# EAGLE board Controller (EAGLE 7.2.0)
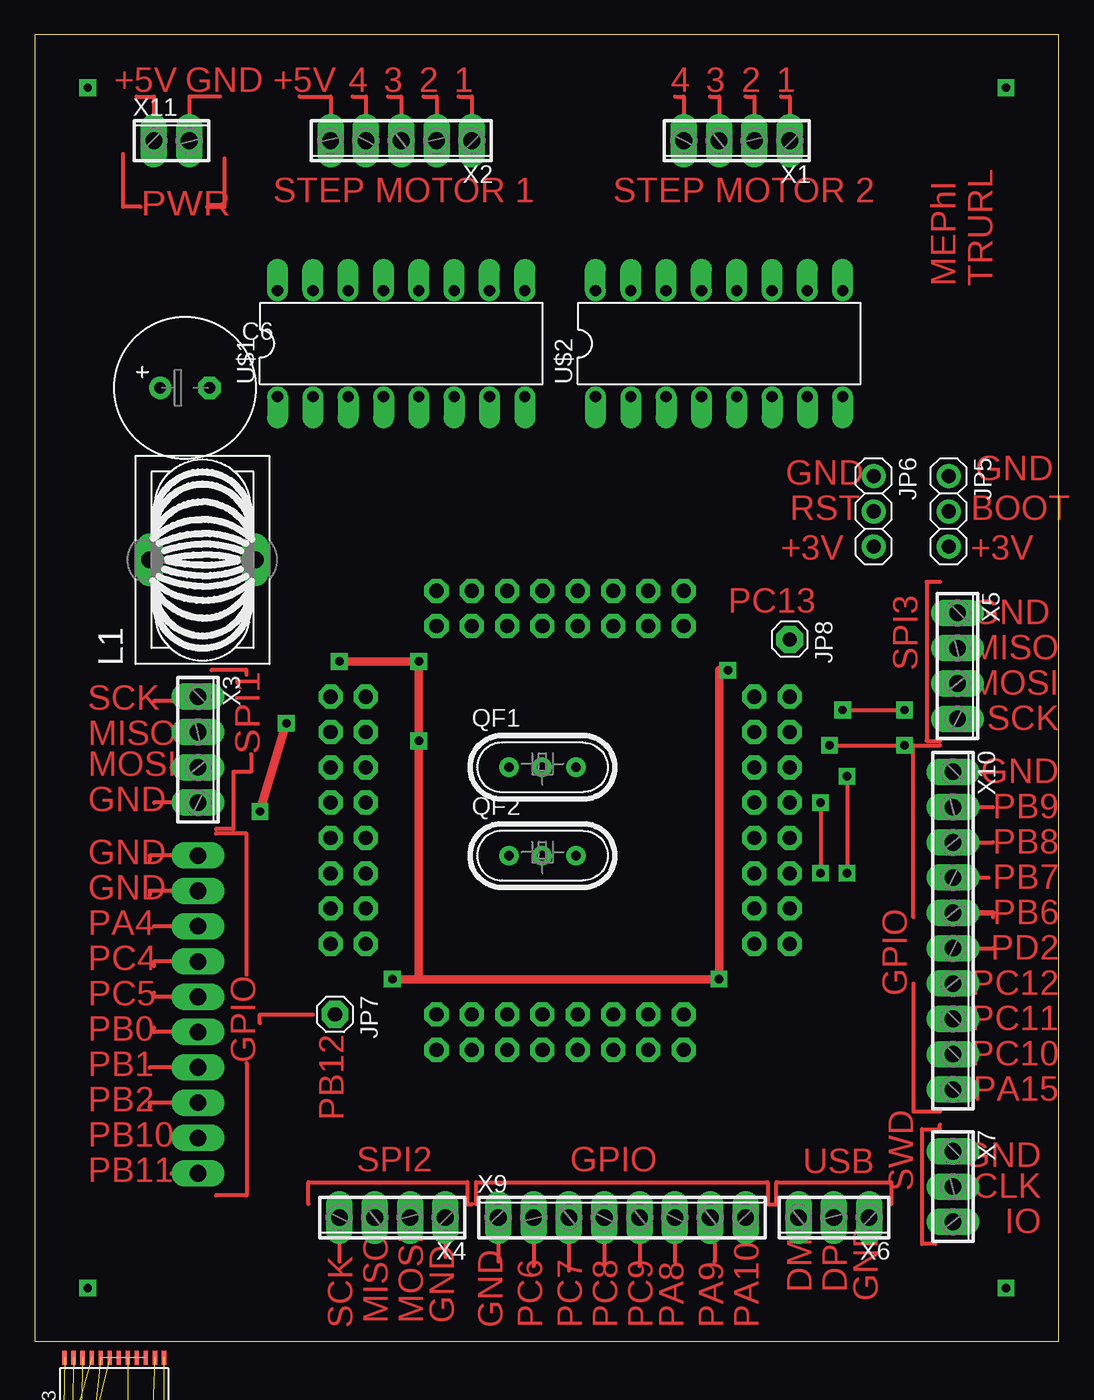
[diagram p0: board, top side]
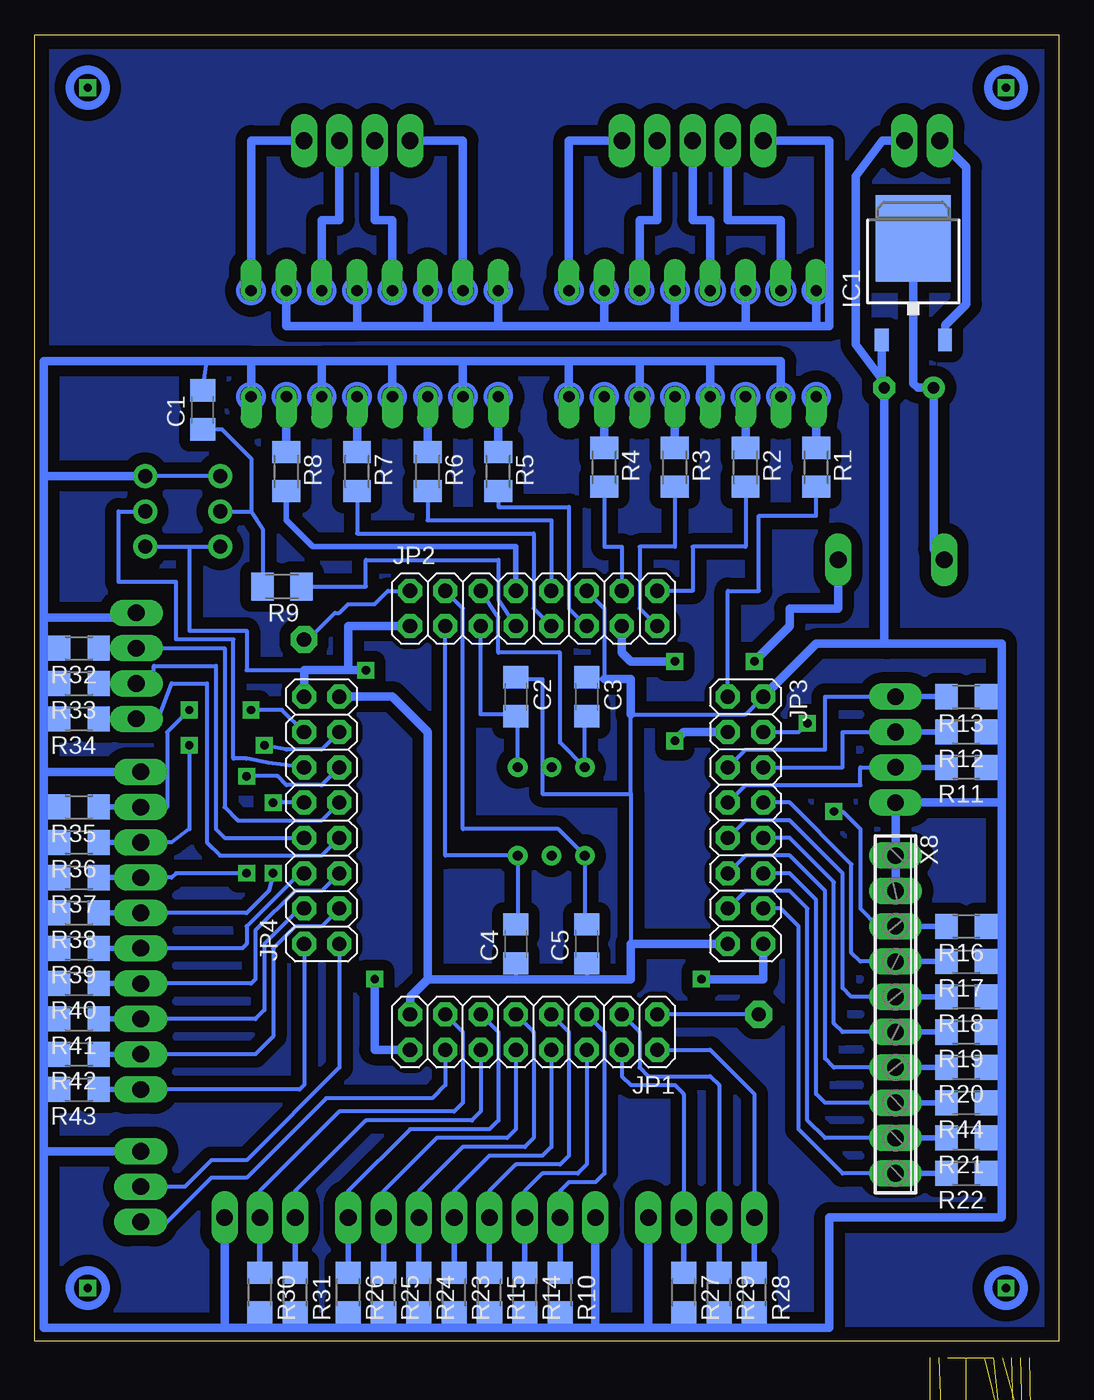
[diagram p1: board, bottom side, seen from below]

Size 73.66 x 93.98 mm. Coordinates in mm from the lower left corner, seen from the top.
Outline: 0,0 73.66,0 73.66,93.98 0,93.98 0,0
Copper layers (1*16): Top 0.035mm / dielectric 1.5mm / Bottom 0.035mm
Design rules "default *": minimum track width 10mil, minimum drill 24mil, track to track 8mil, track to pad 8mil, pad to pad 8mil, via to via 8mil, smd to smd 8mil, copper to edge 40mil, drill to drill 8mil, minimum pad ring 14mil, minimum via ring 12mil, stop-mask expansion 4mil, vias tented up to drill 0mil, thermal gap 10mil

## Footprints (pad centres in the part's own frame; a part is rotated, then mirrored left to right if it is on the bottom)
C1206 = smd 1.6 x 1.8: 1 -1.4,0; 2 1.4,0
E3,5-10 = drill 0.813 pad 1.6: + -1.778,0 | drill 0.813 pad 1.6 octagon: - 1.778,0
E1,8-4 = drill 0.711 pad 1.168: + -0.889,0 | drill 0.711 pad 1.168 octagon: - 0.889,0
TO252 = smd 1 x 1.6: 1 -2.28,-4.8; 2 2.28,-4.8 | smd 5.4 x 6.2: TAB 0,2.5
2X08 = drill 1.016 octagon: 1 -8.89,-1.27; 2 -8.89,1.27; 3 -6.35,-1.27; 4 -6.35,1.27; 5 -3.81,-1.27; 6 -3.81,1.27; 7 -1.27,-1.27; 8 -1.27,1.27; 9 1.27,-1.27; 10 1.27,1.27; 11 3.81,-1.27; 12 3.81,1.27; 13 6.35,-1.27; 14 6.35,1.27; 15 8.89,-1.27; 16 8.89,1.27
1X03 = drill 1.016: 1 -2.54,0; 2 0,0; 3 2.54,0
1X01 = drill 1.016 pad 1.93 octagon: 1 0,0
1X02 = drill 1.016 long: 1 -1.27,0; 2 1.27,0
1X08 = drill 1.016 long: 1 -8.89,0; 2 -6.35,0; 3 -3.81,0; 4 -1.27,0; 5 1.27,0; 6 3.81,0; 7 6.35,0; 8 8.89,0
1X06 = drill 1.016 long: 1 -6.35,0; 2 -3.81,0; 3 -1.27,0; 4 1.27,0; 5 3.81,0; 6 6.35,0
A26GFC = drill 1.194 long: 1 0,3.81; 2 0,-3.81
HC49U = drill 0.7 pad 1.2: 1 -2.413,0; 2 -0.027,0; 3 2.413,0
M1206 = smd 1.6 x 2: 1 -1.4,0; 2 1.4,0
R1206 = smd 1.6 x 1.803: 1 -1.422,0; 2 1.422,0
DIL16 = drill 0.813 offset: 1 -8.89,-3.81; 2 -6.35,-3.81; 3 -3.81,-3.81; 4 -1.27,-3.81; 5 1.27,-3.81; 6 3.81,-3.81; 7 6.35,-3.81; 8 8.89,-3.81; 9 8.89,3.81; 10 6.35,3.81; 11 3.81,3.81; 12 1.27,3.81; 13 -1.27,3.81; 14 -3.81,3.81; 15 -6.35,3.81; 16 -8.89,3.81
TSSOP24 = smd 0.305 x 0.991: 1 -3.575,-2.918; 2 -2.925,-2.918; 3 -2.275,-2.918; 4 -1.625,-2.918; 5 -0.975,-2.918; 6 -0.325,-2.918; 7 0.325,-2.918; 8 0.975,-2.918; 9 1.625,-2.918; 10 2.275,-2.918; 11 2.925,-2.918; 12 3.575,-2.918; 13 3.575,2.918; 14 2.925,2.918; 15 2.275,2.918; 16 1.625,2.918; 17 0.975,2.918; 18 0.325,2.918; 19 -0.325,2.918; 20 -0.975,2.918; 21 -1.625,2.918; 22 -2.275,2.918; 23 -2.925,2.918; 24 -3.575,2.918
SOT25 = smd 0.55 x 1.2: 1 -0.95,-1.3; 2 0,-1.3; 3 0.95,-1.3; 4 0.95,1.3; 5 -0.95,1.3
4POL254 = drill 1.2 long: 1 -3.81,0; 2 -1.27,0; 3 1.27,0; 4 3.81,0
5POL254 = drill 1.2 long: 1 -5.08,0; 2 -2.54,0; 3 0,0; 4 2.54,0; 5 5.08,0
3POL254 = drill 1.2 long: 1 -2.54,0; 2 0,0; 3 2.54,0
10POL254 = drill 1.2 long: 1 -11.43,0; 2 -8.89,0; 3 -6.35,0; 4 -3.81,0; 5 -1.27,0; 6 1.27,0; 7 3.81,0; 8 6.35,0; 9 8.89,0; 10 11.43,0
8POL254 = drill 1.2 long: 1 -8.89,0; 2 -6.35,0; 3 -3.81,0; 4 -1.27,0; 5 1.27,0; 6 3.81,0; 7 6.35,0; 8 8.89,0
2POL254 = drill 1.2 long: 1 -1.27,0; 2 1.27,0

## Placement (x,y rotation side)
C1  [C1206]  61.59,66.99 90 bottom
C2  [C1206]  39.05,46.35 270 bottom
C3  [C1206]  33.97,46.35 270 bottom
C4  [C1206]  39.05,28.57 90 bottom
C5  [C1206]  33.97,28.57 90 bottom
C6  [E3,5-10]  10.79,68.58 0 top
C7  1uF  [C1206]  2.54,-18.41 0 top  (outside the outline)
C8  2.2uF  [C1206]  2.54,-22.54 0 top  (outside the outline)
C9  0.01uF  [C1206]  2.54,-26.67 0 top  (outside the outline)
C10  22uF  [E1,8-4]  2.22,-82.87 0 top  (outside the outline)
C11  22uF  [E1,8-4]  2.22,-87.63 0 top  (outside the outline)
C12  0.1uF  [C1206]  2.54,-93.03 0 top  (outside the outline)
C13  0.1uF  [C1206]  2.54,-99.06 0 top  (outside the outline)
IC1  LM1117IDTX-5.0  [TO252]  10.48,76.83 0 bottom
JP1  [2X08]  37.78,22.23 180 bottom
JP2  [2X08]  37.78,52.7 0 bottom
JP3  [2X08]  22.54,37.47 270 bottom
JP4  [2X08]  53.02,37.47 90 bottom
JP5  [1X03]  65.72,59.69 270 top
JP6  [1X03]  60.33,59.69 270 top
JP7  [1X01]  21.59,23.5 270 top
JP8  [1X01]  54.29,50.48 270 top
JP9  [1X02]  3.17,-33.34 0 top  (outside the outline)
JP10  [1X08]  10.79,-105.73 0 top  (outside the outline)
JP11  [1X06]  8.26,-43.5 0 top  (outside the outline)
JP12  [1X02]  3.17,-110.81 0 top  (outside the outline)
JP13  [1X06]  8.26,-115.89 0 top  (outside the outline)
L1  A26GFC  [A26GFC]  12.06,56.2 90 top
QF1  8M10AHC49T  [HC49U]  36.51,41.27 0 top
QF2  8M10AHC49T  [HC49U]  36.51,34.92 0 top
R1  100  [M1206]  17.46,62.87 270 bottom
R2  100  [M1206]  22.54,62.87 270 bottom
R3  100  [M1206]  27.62,62.87 270 bottom
R4  100  [M1206]  32.7,62.87 270 bottom
R5  100  [M1206]  40.32,62.55 270 bottom
R6  100  [M1206]  45.4,62.55 270 bottom
R7  100  [M1206]  50.48,62.55 270 bottom
R8  100  [M1206]  55.56,62.55 270 bottom
R9  [M1206]  55.88,54.29 180 bottom
R10  100  [R1206]  35.88,3.49 270 bottom
R11  100  [R1206]  6.67,41.27 180 bottom
R12  100  [R1206]  6.67,43.81 180 bottom
R13  100  [R1206]  6.67,46.35 180 bottom
R14  100  [R1206]  38.42,3.49 270 bottom
R15  100  [R1206]  40.96,3.49 270 bottom
R16  100  [R1206]  6.67,29.84 180 bottom
R17  100  [R1206]  6.67,27.3 180 bottom
R18  100  [R1206]  6.67,24.77 180 bottom
R19  100  [R1206]  6.67,22.23 180 bottom
R20  100  [R1206]  6.67,19.68 180 bottom
R21  100  [R1206]  6.67,14.61 180 bottom
R22  100  [R1206]  6.67,12.06 180 bottom
R23  100  [R1206]  43.5,3.49 270 bottom
R24  100  [R1206]  46.04,3.49 270 bottom
R25  100  [R1206]  48.58,3.49 270 bottom
R26  100  [R1206]  51.12,3.49 270 bottom
R27  100  [R1206]  26.99,3.49 270 bottom
R28  100  [R1206]  21.91,3.49 270 bottom
R29  100  [R1206]  24.45,3.49 270 bottom
R30  100  [R1206]  57.47,3.49 270 bottom
R31  100  [R1206]  54.93,3.49 270 bottom
R32  100  [R1206]  70.48,49.85 180 bottom
R33  100  [R1206]  70.48,47.31 180 bottom
R34  100  [R1206]  70.48,44.77 180 bottom
R35  100  [R1206]  70.48,38.42 180 bottom
R36  100  [R1206]  70.48,35.88 180 bottom
R37  100  [R1206]  70.48,33.34 180 bottom
R38  100  [R1206]  70.48,30.8 180 bottom
R39  100  [R1206]  70.48,28.26 180 bottom
R40  100  [R1206]  70.48,25.72 180 bottom
R41  100  [R1206]  70.48,23.18 180 bottom
R42  100  [R1206]  70.48,20.64 180 bottom
R43  100  [R1206]  70.48,18.1 180 bottom
R44  100  [R1206]  6.67,17.14 180 bottom
R45  100  [R1206]  2.54,-53.02 0 top  (outside the outline)
R46  100  [R1206]  2.54,-59.05 0 top  (outside the outline)
R47  100  [R1206]  2.54,-65.09 0 top  (outside the outline)
R48  100  [R1206]  2.54,-71.12 0 top  (outside the outline)
R49  100  [R1206]  2.54,-77.15 0 top  (outside the outline)
U$1  LTV847  [DIL16]  26.35,71.75 0 top
U$2  LTV847  [DIL16]  49.21,71.75 0 top
U$3  AD7190  [TSSOP24]  5.71,-4.13 0 top
U$4  LP2985AIM5-3.3  [SOT25]  2.54,-11.43 0 top  (outside the outline)
X1  [4POL254]  50.48,86.36 180 top
X2  [5POL254]  26.35,86.36 180 top
X3  [4POL254]  11.75,42.55 270 top
X4  [4POL254]  25.72,8.89 180 top
X5  [4POL254]  66.36,48.58 270 top
X6  [3POL254]  57.47,8.89 180 top
X7  [3POL254]  66.04,11.11 270 top
X8  [10POL254]  11.75,23.5 270 bottom
X9  [8POL254]  42.23,8.89 0 top
X10  [10POL254]  66.04,29.53 270 top
X11  [2POL254]  9.84,86.36 0 top

## Library data of the parts
C1-C5 C10 C11 = rcl
C6 JP5-JP8 = adafruit
C7-C9 C12 C13 R1-R49 = resistor
IC1 = lm1117
JP1-JP4 JP9-JP13 = pinhead
L1 = inductors
QF1 QF2 = crystal; OC_FARNELL: unknown; OC_NEWARK: unknown
U$1 U$2 = optocoupler
U$3 = analog-devices
U$4 = LP2985
X1-X11 = con-phoenix-254; OC_FARNELL: unknown; OC_NEWARK: unknown

## Nets
BYPASS: C9.1 U$4.4
N$1: R1.1 U$1.1
N$2: R2.1 U$1.3
N$3: C1.1 JP6.2 R9.2
N$4: R3.1 U$1.5
N$5: R5.1 U$2.1
N$6: R6.1 U$2.3
N$7: R7.1 U$2.5
N$8: R8.1 U$2.7
N$9: R4.1 U$1.7
N$10: C7.1 C11.+ C12.1 JP9.2 U$3.15 U$3.20 U$4.1 U$4.3
N$11: JP2.9 R7.2
N$12: JP2.10 R6.2
N$13: JP2.11 R5.2
N$14: JP2.14 R4.2
N$15: JP2.15 R3.2
N$16: JP1.16 JP2.1 JP2.13 JP3.3 JP3.16 JP4.16 JP5.3 JP6.3 L1.2
N$17: JP3.1 R1.2
N$18: C3.2 JP2.6 QF1.1
N$19: U$1.10 U$1.12 U$1.14 U$1.16 U$2.10 U$2.12 U$2.14 U$2.16 X2.5
N$20: U$1.15 X2.4
N$21: U$1.13 X2.3
N$22: U$1.11 X2.2
N$23: U$1.9 X2.1
N$24: U$2.15 X1.4
N$25: U$2.13 X1.3
N$26: U$2.11 X1.2
N$27: U$2.9 X1.1
N$28: JP4.9 R32.1 X5.2
N$29: JP4.8 R33.1 X5.3
N$30: JP4.7 R34.1 X5.4
N$31: JP1.4 R27.1 X4.2
N$32: JP1.3 R29.1 X4.3
N$33: JP1.2 R28.1 X4.4
N$34: JP3.7 R11.2 X3.3
N$35: JP3.6 R12.2 X3.2
N$36: JP3.5 R13.2 X3.1
N$37: JP4.1 X7.2
N$38: JP1.14 X7.3
N$39: JP1.13 R30.1 X6.2
N$40: JP1.12 R31.1 X6.3
N$41: JP3.4 R16.2 X8.3
N$42: JP3.8 R17.2 X8.4
N$43: JP3.9 R18.2 X8.5
N$44: JP3.10 R19.2 X8.6
N$45: JP3.11 R20.2 X8.7
N$46: JP3.12 R44.2 X8.8
N$47: JP3.13 R21.2 X8.9
N$48: JP3.14 R22.2 X8.10
N$49: JP1.5 R10.1 X9.2
N$50: JP1.6 R14.1 X9.3
N$51: JP1.7 R15.1 X9.4
N$52: JP1.8 R23.1 X9.5
N$53: JP1.9 R24.1 X9.6
N$54: JP1.10 R25.1 X9.7
N$55: JP1.11 R26.1 X9.8
N$56: JP4.14 R35.1 X10.2
N$57: JP4.13 R36.1 X10.3
N$58: JP4.11 R37.1 X10.4
N$59: JP4.10 R38.1 X10.5
N$60: JP4.6 R39.1 X10.6
N$61: JP4.5 R40.1 X10.7
N$62: JP4.4 R41.1 X10.8
N$63: JP4.3 R42.1 X10.9
N$64: JP4.2 R43.1 X10.10
N$65: JP1.1 JP7.1
N$66: C1.2 C2.1 C3.1 C4.1 C5.1 C6.- IC1.1 JP1.15 JP2.12 JP3.2 JP3.15 JP4.15 JP5.1 JP6.1 R10.2 R11.1 R12.1 R13.1 R14.2 R15.2 R16.1 R17.1 R18.1 R19.1 R20.1 R21.1 R22.1 R23.2 R24.2 R25.2 R26.2 R27.2 R28.2 R29.2 R30.2 R31.2 R32.2 R33.2 R34.2 R35.2 R36.2 R37.2 R38.2 R39.2 R40.2 R41.2 R42.2 R43.2 R44.1 U$1.2 U$1.4 U$1.6 U$1.8 U$2.2 U$2.4 U$2.6 U$2.8 X3.4 X4.1 X5.1 X6.1 X7.1 X8.1 X8.2 X9.1 X10.1 X11.2
N$67: IC1.2 X11.1
N$68: JP2.7 R9.1
N$69: JP4.12 JP5.2
N$70: C2.2 JP2.5 QF1.3
N$71: C4.2 JP2.3 QF2.3
N$72: C5.2 JP2.4 QF2.1
N$73: JP2.2 JP8.1
N$74: C6.+ IC1.TAB L1.1
N$77: JP2.16 R2.2
N$97: JP10.1 JP10.3 JP10.5 JP10.7 U$3.17
N$100: JP2.8 R8.2
N$101: C8.1 C10.+ C13.1 U$3.21 U$4.5
N$102: JP11.2 R45.2
N$103: JP11.3 R46.2
N$104: JP11.4 R47.2
N$105: JP11.5 R48.2
N$106: JP11.6 R49.2
N$107: R45.1 U$3.24
N$108: R46.1 U$3.23
N$109: R47.1 U$3.3
N$110: R48.1 U$3.4
N$111: R49.1 U$3.22
N$112: JP10.8 U$3.11
N$113: JP10.6 U$3.12
N$114: JP10.4 U$3.13
N$115: JP10.2 U$3.14
N$116: C7.2 C8.2 C9.2 C10.- C11.- C12.2 C13.2 JP9.1 JP11.1 JP13.1 U$3.16 U$3.18 U$3.19 U$4.2
N$117: JP12.2 U$3.1
N$118: JP12.1 U$3.2
N$119: JP13.6 U$3.5
N$120: JP13.5 U$3.6
N$121: JP13.4 U$3.7
N$122: JP13.3 U$3.8
N$123: JP13.2 U$3.10

## Tracks (layer width: path | path; a pad name or v marks a point on that pad's centre or on a via)
BYPASS  (1 unrouted)
N$1
  Bottom 0.61: R1.1 U$1.1
N$2
  Bottom 0.61: R2.1 U$1.3
N$3
  Bottom 0.305: JP6.2 58.1,59.69 | 58.1,59.69 57.28,58.42 R9.2 | C1.1 60.2,65.59 58.1,63.5 58.1,59.69
N$4
  Bottom 0.61: R3.1 U$1.5
N$5
  Bottom 0.61: R5.1 U$2.1
N$6
  Bottom 0.61: R6.1 U$2.3
N$7
  Bottom 0.61: R7.1 U$2.5
N$8
  Bottom 0.61: R8.1 U$2.7
N$9
  Bottom 0.61: R4.1 U$1.7
N$10  (7 unrouted)
N$11
  Bottom 0.305: R7.2 50.48,58.1 37.78,58.1 37.78,52.7 JP2.9
N$12
  Bottom 0.305: R6.2 45.4,59.05 36.51,59.05 JP2.10
N$13
  Bottom 0.305: R5.2 40.32,60.01 35.24,60.01 35.24,52.7 JP2.11
N$14
  Bottom 0.305: R4.2 32.7,57.15 31.43,57.15 JP2.14
N$15
  Bottom 0.305: R3.2 27.62,57.15 30.16,57.15 30.16,52.7 JP2.15
N$16  (via drill 0.6)
  Top 0.61: v25.72,26.04 27.62,26.04 | 27.62,26.04 v27.62,43.18 v27.62,48.9 v21.91,48.9 | 27.62,26.04 v49.21,26.04 49.21,48.26 v49.85,48.26
  Bottom 0.305: JP5.3 62.55,57.15 | 62.55,57.15 62.55,51.12 58.42,51.12 58.42,48.26 54.29,48.26 | 62.55,57.15 JP6.3
  Bottom 0.61: JP2.13 31.43,49.53 30.8,48.9 v27.62,48.9 | v27.62,43.18 26.99,43.81 JP3.3 | JP3.16 21.27,26.04 v25.72,26.04 | v49.21,26.04 49.21,20.95 JP1.16 | JP4.16 54.29,48.26 51.12,48.26 | 51.12,48.26 v49.85,48.26 | JP2.1 51.12,51.44 51.12,48.26 | L1.2 15.88,52.7 19.37,52.7 19.37,51.44 v21.91,48.9
N$17
  Bottom 0.305: JP3.1 23.81,53.98 21.59,53.98 21.59,59.37 17.46,59.37 R1.2
N$18
  Bottom 0.305: C3.2 34.1,44.83 QF1.1 35.88,43.05 35.88,49.53 40.32,49.53 40.32,52.07 JP2.6
N$19
  Bottom 0.61: U$2.10 55.56,73.03 50.48,73.03 | 50.48,73.03 U$2.12 | U$2.14 45.4,73.03 | 45.4,73.03 50.48,73.03 | U$2.16 40.32,73.03 | 40.32,73.03 45.4,73.03 | U$1.10 32.7,73.03 | 32.7,73.03 40.32,73.03 | U$1.12 27.62,73.03 | 27.62,73.03 32.7,73.03 | U$1.14 22.54,73.03 | 22.54,73.03 27.62,73.03 | U$1.16 17.46,73.03 | 17.46,73.03 22.54,73.03 | X2.5 16.51,86.36 16.51,73.03 17.46,73.03
N$20
  Bottom 0.61: X2.4 23.81,80.64 20,80.64 U$1.15
N$21
  Top 0.305: 25.4,89.53 26.35,89.53 X2.3
  Bottom 0.61: X2.3 26.35,80.64 25.08,80.64 U$1.13
N$22
  Top 0.305: 27.94,89.53 28.89,89.53 X2.2
  Bottom 0.61: U$1.11 30.16,80.64 28.89,80.64 X2.2
N$23
  Top 0.305: 30.48,89.53 31.43,89.53 X2.1
  Bottom 0.61: U$1.9 35.24,86.36 X2.1
N$24
  Top 0.305: 46.04,89.53 46.67,89.53 X1.4
  Bottom 0.61: U$2.15 42.86,86.36 X1.4
N$25
  Top 0.305: 48.58,89.53 49.21,89.53 X1.3
  Bottom 0.61: U$2.13 47.94,80.64 49.21,80.64 X1.3
N$26
  Top 0.305: 51.12,89.53 51.75,89.53 X1.2
  Bottom 0.61: U$2.11 53.02,80.64 51.75,80.64 X1.2
N$27
  Top 0.305: 53.66,89.53 54.29,89.53 X1.1
  Bottom 0.61: U$2.9 58.1,86.36 X1.1
N$28
  Bottom 0.305: JP4.9 53.02,37.47 59.05,37.47 60.01,38.42 60.01,49.85 X5.2
  Bottom 0.406: R32.1 X5.2
N$29
  Bottom 0.305: JP4.8 60.01,36.2 60.64,36.83 60.64,48.58 65.09,48.58 65.09,47.31 X5.3
  Bottom 0.406: R33.1 X5.3
N$30
  Bottom 0.305: JP4.7 53.02,34.92 60.33,34.92 61.28,35.88 61.28,47.31 63.82,47.31 64.77,44.77 X5.4
  Bottom 0.406: R34.1 X5.4
N$31
  Bottom 0.305: JP1.4 31.43,19.05 30.8,18.41 27.62,18.41 26.99,17.78 X4.2
  Bottom 0.406: R27.1 X4.2
N$32
  Bottom 0.305: JP1.3 30.16,22.23 30.16,19.68 29.53,19.05 25.08,19.05 24.45,18.41 X4.3
  Bottom 0.406: R29.1 X4.3
N$33
  Top 0.305: X4.4 21.91,5.71
  Bottom 0.305: JP1.2 25.08,20.95 21.91,17.78 X4.4
  Bottom 0.406: R28.1 X4.4
N$34
  Top 0.305: X3.3 9.84,41.27
  Bottom 0.305: JP3.7 22.54,40.01 14.29,40.01 14.29,41.27 X3.3
  Bottom 0.406: R11.2 X3.3
N$35
  Top 0.305: X3.2 10.16,43.81
  Bottom 0.305: JP3.6 15.56,41.27 15.56,43.81 X3.2
  Bottom 0.406: R12.2 X3.2
N$36
  Top 0.305: X3.1 11.75,46.04 8.57,46.04
  Bottom 0.305: JP3.5 22.54,42.55 16.83,42.55 16.83,46.35 X3.1
  Bottom 0.406: R13.2 X3.1
N$37
  Bottom 0.305: JP4.1 51.75,19.68 58.42,13.02 60.96,13.02 62.87,11.11 X7.2
N$38
  Bottom 0.305: JP1.14 44.13,18.41 45.09,17.46 52.7,17.46 58.42,11.75 60.96,11.75 64.14,8.57 X7.3
N$39
  Bottom 0.305: JP1.13 42.86,22.23 42.86,17.14 43.5,16.51 51.75,16.51 57.47,10.79 X6.2
  Bottom 0.406: R30.1 X6.2
N$40
  Bottom 0.305: JP1.12 41.59,16.51 42.23,15.88 49.85,15.88 54.93,10.79 X6.3
  Bottom 0.406: R31.1 X6.3
N$41  (via drill 0.6)
  Top 0.305: X8.3 8.57,29.84
  Top 0.61: v18.1,44.45 v16.19,38.1
  Bottom 0.305: JP3.4 18.73,43.81 v18.1,44.45 | v16.19,38.1 15.56,38.1 14.29,36.83 14.29,31.11 13.02,29.84 X8.3
  Bottom 0.406: R16.2 X8.3
N$42
  Top 0.305: X8.4 8.57,27.3 8.57,26.99
  Bottom 0.305: X8.4 14.29,27.3 14.92,27.94 14.92,34.29 19.37,38.73 JP3.8
  Bottom 0.406: R17.2 X8.4
N$43
  Top 0.305: X8.5 8.57,24.77 8.57,25.08
  Bottom 0.305: X8.5 14.92,24.77 15.56,25.4 15.56,33.66 19.37,37.47 22.54,37.47 JP3.9
  Bottom 0.406: R18.2 X8.5
N$44
  Top 0.305: X8.6 8.57,22.23 8.57,22.54
  Bottom 0.305: X8.6 15.56,22.23 16.19,22.86 16.19,33.02 19.37,36.2 JP3.10
  Bottom 0.406: R19.2 X8.6
N$45
  Top 0.305: X8.7 8.26,19.68
  Bottom 0.305: X8.7 16.19,19.68 16.83,20.32 16.83,32.38 19.37,34.92 22.54,34.92 JP3.11
  Bottom 0.406: R20.2 X8.7
N$46
  Top 0.305: X8.8 8.26,17.14 8.26,16.83
  Bottom 0.305: X8.8 16.83,17.14 17.46,17.78 17.46,31.75 19.37,33.66 JP3.12
  Bottom 0.406: R44.2 X8.8
N$47
  Top 0.305: X8.9 9.84,14.61
  Bottom 0.305: X8.9 16.83,14.61 18.1,15.88 18.1,31.11 19.37,32.38 22.54,32.38 JP3.13
  Bottom 0.406: R21.2 X8.9
N$48
  Top 0.305: X8.10 9.84,12.06
  Bottom 0.305: X8.10 15.56,12.06 18.73,15.24 18.73,29.84 20,31.11 JP3.14
  Bottom 0.406: R22.2 X8.10
N$49
  Top 0.305: X9.2 35.88,5.4
  Bottom 0.305: JP1.5 32.7,22.23 32.7,12.06 33.34,11.43 35.24,11.43 35.88,10.79 X9.2
  Bottom 0.406: R10.1 X9.2
N$50
  Bottom 0.305: JP1.6 33.97,12.7 34.61,12.06 37.15,12.06 38.42,10.79 X9.3
  Bottom 0.406: R14.1 X9.3
N$51
  Top 0.305: X9.4 40.96,5.4
  Bottom 0.305: JP1.7 35.24,22.23 35.24,13.34 35.88,12.7 39.05,12.7 40.96,10.79 X9.4
  Bottom 0.406: R15.1 X9.4
N$52
  Top 0.305: X9.5 43.5,5.4
  Bottom 0.305: JP1.8 36.51,13.97 37.15,13.34 40.96,13.34 43.5,10.79 X9.5
  Bottom 0.406: R23.1 X9.5
N$53
  Bottom 0.305: JP1.9 37.78,22.23 37.78,14.61 38.42,13.97 42.86,13.97 46.04,10.79 X9.6
  Bottom 0.406: R24.1 X9.6
N$54
  Bottom 0.305: JP1.10 39.05,15.24 39.69,14.61 44.77,14.61 48.58,10.79 X9.7
  Bottom 0.406: R25.1 X9.7
N$55
  Bottom 0.305: JP1.11 40.32,22.23 40.32,15.88 40.96,15.24 46.67,15.24 51.12,10.79 X9.8
  Bottom 0.406: R26.1 X9.8
N$56  (via drill 0.6)
  Top 0.305: v58.1,45.4 v62.55,45.4 | X10.2 68.9,38.42
  Bottom 0.305: JP4.14 55.88,45.4 v58.1,45.4 | v62.55,45.4 64.14,43.81 64.14,38.42 X10.2
  Bottom 0.406: R35.1 X10.2
N$57  (via drill 0.6)
  Top 0.305: v57.15,42.86 v62.55,42.86 | X10.3 68.9,35.88
  Bottom 0.305: JP4.13 53.02,42.55 55.56,42.55 v57.15,42.86 | v62.55,42.86 62.55,36.83 63.82,35.88 X10.3
  Bottom 0.406: R36.1 X10.3
N$58  (via drill 0.6)
  Top 0.305: v58.42,40.64 v58.42,33.66 | X10.4 68.58,33.34
  Bottom 0.305: JP4.11 53.02,40.01 55.56,40.01 56.2,40.64 v58.42,40.64 | v58.42,33.66 63.5,33.66 63.82,33.34 X10.4
  Bottom 0.406: R37.1 X10.4
N$59  (via drill 0.6)
  Top 0.305: v56.52,38.73 v56.52,33.66 | 68.9,30.8 68.9,30.48
  Top 0.406: 68.9,30.8 X10.5
  Bottom 0.305: JP4.10 v56.52,38.73 | v56.52,33.66 56.83,32.38 58.42,30.8 X10.5
  Bottom 0.406: R38.1 X10.5
N$60
  Top 0.305: X10.6 68.9,28.26
  Bottom 0.305: JP4.6 54.61,33.66 58.42,29.84 58.42,28.57 58.74,28.26 X10.6
  Bottom 0.406: R39.1 X10.6
N$61
  Bottom 0.305: JP4.5 53.02,32.38 54.93,32.38 57.78,29.53 57.78,26.04 58.1,25.72 X10.7
  Bottom 0.406: R40.1 X10.7
N$62
  Bottom 0.305: JP4.4 54.61,31.11 57.15,28.57 57.15,23.81 57.78,23.18 X10.8
  Bottom 0.406: R41.1 X10.8
N$63
  Bottom 0.305: JP4.3 53.02,29.84 54.93,29.84 56.52,28.26 56.52,21.91 57.78,20.64 X10.9
  Bottom 0.406: R42.1 X10.9
N$64
  Bottom 0.305: JP4.2 54.29,18.41 54.61,18.1 X10.10
  Bottom 0.406: R43.1 X10.10
N$65
  Bottom 0.305: JP7.1 JP1.1
N$66
  Top 0.305: 13.34,89.53 11.11,89.53 X11.2 | X8.1 8.26,34.92 8.26,34.61 | X8.2 8.26,32.38 8.26,32.07 | X3.4 8.57,38.73 | X10.1 68.9,40.96 | X4.1 29.53,6.03 | X9.1 33.34,5.71
  Bottom 0.305: JP3.2 22.54,45.09 30.8,45.09 30.8,39.37 | JP2.12 32.7,52.7 32.7,47.62 33.84,47.76 C3.1 | 30.8,39.37 30.8,28.57 | C2.1 38.92,47.62 37.15,47.62 37.15,39.37 30.8,39.37 | C4.1 39.05,26.04 | C5.1 33.97,26.04 | JP6.1 JP5.1 | C1.2 61.28,70.48
  Bottom 0.406: R13.1 4.45,46.35 4.13,46.04 | R12.1 4.45,43.81 4.13,43.5 | R11.1 4.13,41.27 | R16.1 4.13,29.84 | R17.1 4.45,27.3 4.13,26.99 | R18.1 4.45,24.77 4.13,24.45 | R19.1 4.13,22.23 | R20.1 4.13,19.68 | R44.1 4.45,17.14 4.13,16.83 | R21.1 4.45,14.61 4.13,14.29 | R22.1 4.13,12.06 | R32.2 73.03,49.85 | R33.2 73.03,47.31 | R34.2 71.91,44.62 72.07,44.45 73.03,44.45 | R35.2 72.71,38.42 73.03,38.1 | R36.2 72.71,35.88 73.03,35.56 | R37.2 72.71,33.34 73.03,33.02 | R38.2 72.71,30.8 73.03,30.48 | R39.2 72.71,28.26 73.03,27.94 | R40.2 73.03,25.72 | R41.2 73.03,23.18 | R42.2 72.39,20.64 73.03,20 | R43.2 71.91,17.93 71.75,17.78 73.03,17.78 | R30.2 57.47,1.27 57.15,0.95 | R31.2 55.08,2.07 55.24,1.91 55.24,1.59 54.61,0.95 | R26.2 51.12,1.27 50.8,0.95 | R25.2 48.58,1.27 48.9,0.95 | R24.2 46.04,1.27 45.72,0.95 | R23.2 43.5,1.27 43.18,0.95 | R15.2 40.96,0.95 | R14.2 38.42,0.95 | R10.2 35.73,2.07 35.56,1.91 36.2,1.91 36.2,0.95 | R27.2 26.99,0.95 | R29.2 24.45,1.27 24.77,0.95 | R28.2 22.06,2.07 22.23,1.91 22.23,1.27 21.91,0.95
  Bottom 0.61: U$2.8 58.1,70.48 | 58.1,70.48 53.02,70.48 | 53.02,70.48 U$2.6 | U$2.4 47.94,70.48 | 47.94,70.48 53.02,70.48 | U$2.2 42.86,70.48 | 42.86,70.48 47.94,70.48 | U$1.8 35.24,70.48 | 35.24,70.48 42.86,70.48 | U$1.6 30.16,70.48 | 30.16,70.48 35.24,70.48 | U$1.4 25.08,70.48 | 25.08,70.48 30.16,70.48 | U$1.2 20,70.48 25.08,70.48 | JP3.15 30.8,28.57 30.8,26.04 33.97,26.04 39.05,26.04 45.4,26.04 | 45.4,26.04 46.67,24.77 JP1.15 | JP4.15 47.94,46.35 45.4,43.81 45.4,26.04 | 32.7,47.62 30.8,47.62 30.8,45.09 | X8.2 X8.1 X3.4 4.13,38.73 | 4.13,38.73 4.13,41.27 4.13,43.5 4.13,46.04 4.13,50.16 12.38,50.16 | 12.38,50.16 17.46,50.16 JP3.2 | X7.1 73.03,13.65 | 73.03,13.65 73.03,0.95 60.01,0.95 | 60.01,0.95 57.15,0.95 54.61,0.95 50.8,0.95 48.9,0.95 45.72,0.95 43.18,0.95 40.96,0.95 38.42,0.95 36.2,0.95 33.34,0.95 | 33.34,0.95 29.53,0.95 | 29.53,0.95 X4.1 | 33.34,0.95 X9.1 33.34,5.71 | X6.1 60.01,0.95 | 29.53,0.95 26.99,0.95 24.77,0.95 21.91,0.95 16.51,0.95 16.51,8.89 4.13,8.89 4.13,12.06 4.13,14.29 4.13,16.83 4.13,19.68 4.13,22.23 4.13,24.45 4.13,26.99 4.13,29.84 4.13,38.73 | X10.1 73.03,40.96 | 73.03,40.96 73.03,38.1 73.03,35.56 73.03,33.02 73.03,30.48 73.03,27.94 73.03,25.72 73.03,23.18 73.03,20 73.03,17.78 73.03,13.65 | X5.1 66.67,52.07 73.03,52.07 | 73.03,52.07 73.03,49.85 73.03,47.31 73.03,44.45 73.03,40.96 | 58.1,70.48 61.28,70.48 73.03,70.48 73.03,62.23 | 73.03,62.23 73.03,52.07 | JP5.1 73.03,62.23 | 12.38,50.16 12.57,50.35 C6.- 12.76,68.76 12.76,69.22 | IC1.1 12.76,69.22 | X11.2 12.7,86.36 14.61,83.82 14.61,71.7 12.76,69.22
N$67
  Top 0.305: 7.3,89.53 8.57,89.53 X11.1
  Bottom 0.61: IC1.2 8.2,73.08 6.67,74.61 6.67,84.45 X11.1
N$68
  Bottom 0.305: R9.1 49.85,54.29 49.85,56.2 40.32,56.2 40.32,53.34 JP2.7
N$69
  Bottom 0.305: JP4.12 56.83,41.59 58.42,41.91 59.37,41.91 59.37,50.48 63.5,50.48 63.5,54.61 67.63,54.61 67.63,59.69 JP5.2
N$70
  Bottom 0.305: QF1.3 38.92,44.83 C2.2 39.18,45.09 41.59,45.09 JP2.5
N$71
  Bottom 0.305: C4.2 38.92,30.1 QF2.3 44.13,34.92 JP2.3
N$72
  Bottom 0.305: C5.2 34.1,30.1 QF2.1 36.01,36.83 42.86,36.83 42.86,52.7 JP2.4
N$73
  Bottom 0.305: JP8.1 53.98,50.48 52.07,52.39 51.75,52.39 51.12,53.02 49.21,53.02 48.26,53.98 JP2.2
N$74
  Bottom 0.61: L1.1 9.02,56.96 C6.+ 10.16,68.58 10.48,68.9 IC1.TAB
N$75
  pour Bottom (isolate 0.813): 0,0 73.66,0 73.66,93.98 0,93.98
N$76
  Top 0.305: 19.05,89.53 21.27,89.53 21.27,86.68
N$77
  Bottom 0.305: R2.2 22.54,57.15 26.35,57.15 26.35,53.98 JP2.16
N$78
  Top 0.305: 22.86,89.53 23.81,89.53 23.81,86.68
N$79
  Top 0.305: 15.24,26.35 15.24,36.51 13.02,36.51
N$80
  Top 0.305: 15.24,20 15.24,10.48 13.02,10.48
N$81
  Top 0.305: 16.19,22.86 16.19,23.5 20,23.5
N$82
  Top 0.305: 15.24,47.94 15.24,48.26 12.7,48.26
N$83
  Top 0.305: 15.56,42.23 15.56,40.96 14.29,40.96 14.29,36.83 13.02,36.83
N$84
  Top 0.305: 12.38,81.6 13.65,81.6 13.65,85.09
N$85
  Top 0.305: 7.62,81.6 6.35,81.6 6.35,85.41
N$86
  Top 0.305: 63.18,30.48 63.18,42.86 65.09,42.86
N$87
  Top 0.305: 63.18,25.72 63.18,16.51 65.09,16.51
N$88
  Top 0.305: 65.09,54.61 64.14,54.61 64.14,43.18 65.09,43.18
N$89
  Top 0.305: 19.68,9.84 19.68,11.43 31.11,11.43 31.11,9.84 31.43,9.84
N$90
  Top 0.305: 31.75,9.84 31.75,11.43 52.7,11.43 52.7,9.84 53.34,9.84 53.34,11.43 61.59,11.43 61.59,9.84
N$91
  Top 0.305: 64.77,6.99 63.82,6.99 63.82,15.24 65.09,15.24 65.09,15.56
N$92
  Top 0.305: 38.42,8.57 38.42,5.08
N$93
  Top 0.305: 46.04,8.57 46.04,5.71
N$94
  Top 0.305: 48.9,8.89 48.9,5.71
N$95  (via drill 0.6)
  other vias: 69.85,90.17
N$96  (via drill 0.6)
  other vias: 3.81,90.17
N$97  (4 unrouted)
N$98  (via drill 0.6)
  other vias: 3.81,3.81
N$99  (via drill 0.6)
  other vias: 69.85,3.81
N$100
  Bottom 0.406: R8.2 55.56,59.05 53.66,57.15 39.05,57.15 JP2.8
N$101  (4 unrouted)
N$102  (1 unrouted)
N$103  (1 unrouted)
N$104  (1 unrouted)
N$105  (1 unrouted)
N$106  (1 unrouted)
N$107  (1 unrouted)
N$108  (1 unrouted)
N$109  (1 unrouted)
N$110  (1 unrouted)
N$111  (1 unrouted)
N$112  (1 unrouted)
N$113  (1 unrouted)
N$114  (1 unrouted)
N$115  (1 unrouted)
N$116  (13 unrouted)
N$117  (1 unrouted)
N$118  (1 unrouted)
N$119  (1 unrouted)
N$120  (1 unrouted)
N$121  (1 unrouted)
N$122  (1 unrouted)
N$123  (1 unrouted)
(copper drawn outside any net)
  shapes: Bottom circle x36

## Text on the board
Top: +5V | GND | +5V | 4 | 3 | 2 | 1 | 4 | 3 | 2 | 1 | STEP MOTOR 1 | STEP MOTOR 2 | PWR | MEPhI / TRURL | GND | GND | RST | BOOT | +3V | +3V | GND | PC13 | MISO | SPI3 | MOSI | SCK | SCK | MISO | SPI1 | GND | MOSI | PB9 | GND | PB8 | GND | PB7 | GND | PB6 | GPIO | PA4 | PD2 | PC4 | PC12 | PC5 | PC11 | PB0 | PC10 | GPIO | PB1 | PA15 | PB2 | PB12 | PB10 | SPI2 | GPIO | GND | USB | CLK | PB11 | SWD | IO | DM | DP | GND | SCK | MISO | MOSI | GND | GND | PC6 | PC7 | PC8 | PC9 | PA8 | PA9 | PA10